# Altium PCB Arduino-Pro-Mini.PcbDoc
Units mil, origin at the board's own origin, x right, y up, seen from the top; angles counter-clockwise.
Board outline 700 x 1300 mil, 2 copper layers (Top, Bottom), stack 61.811 mil thick; 29 components, 33 nets, 108 pads, 29 vias.
Unrouted connection lines stored in the file: 1.
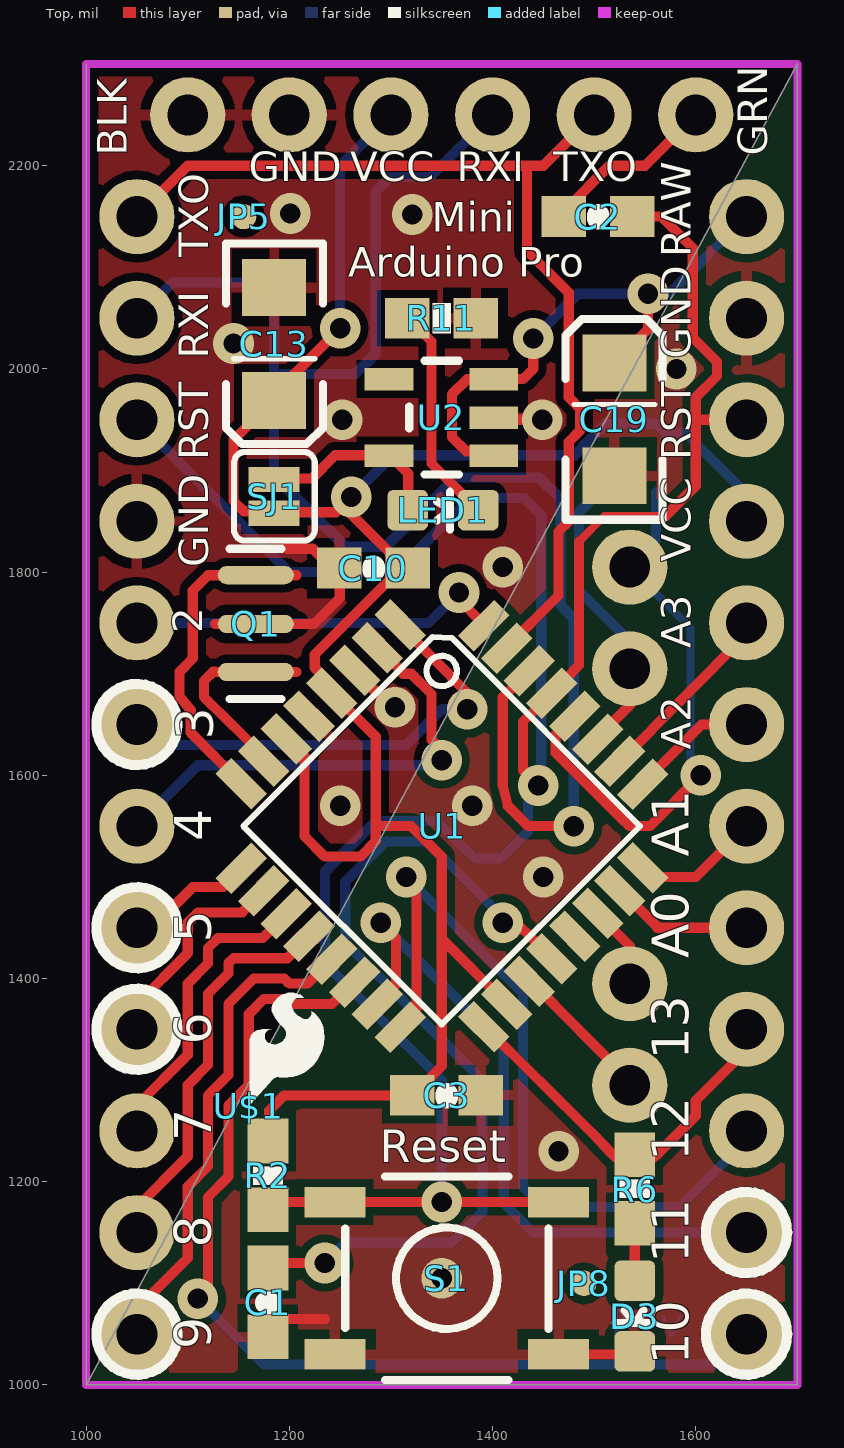
[diagram p0: Top view]
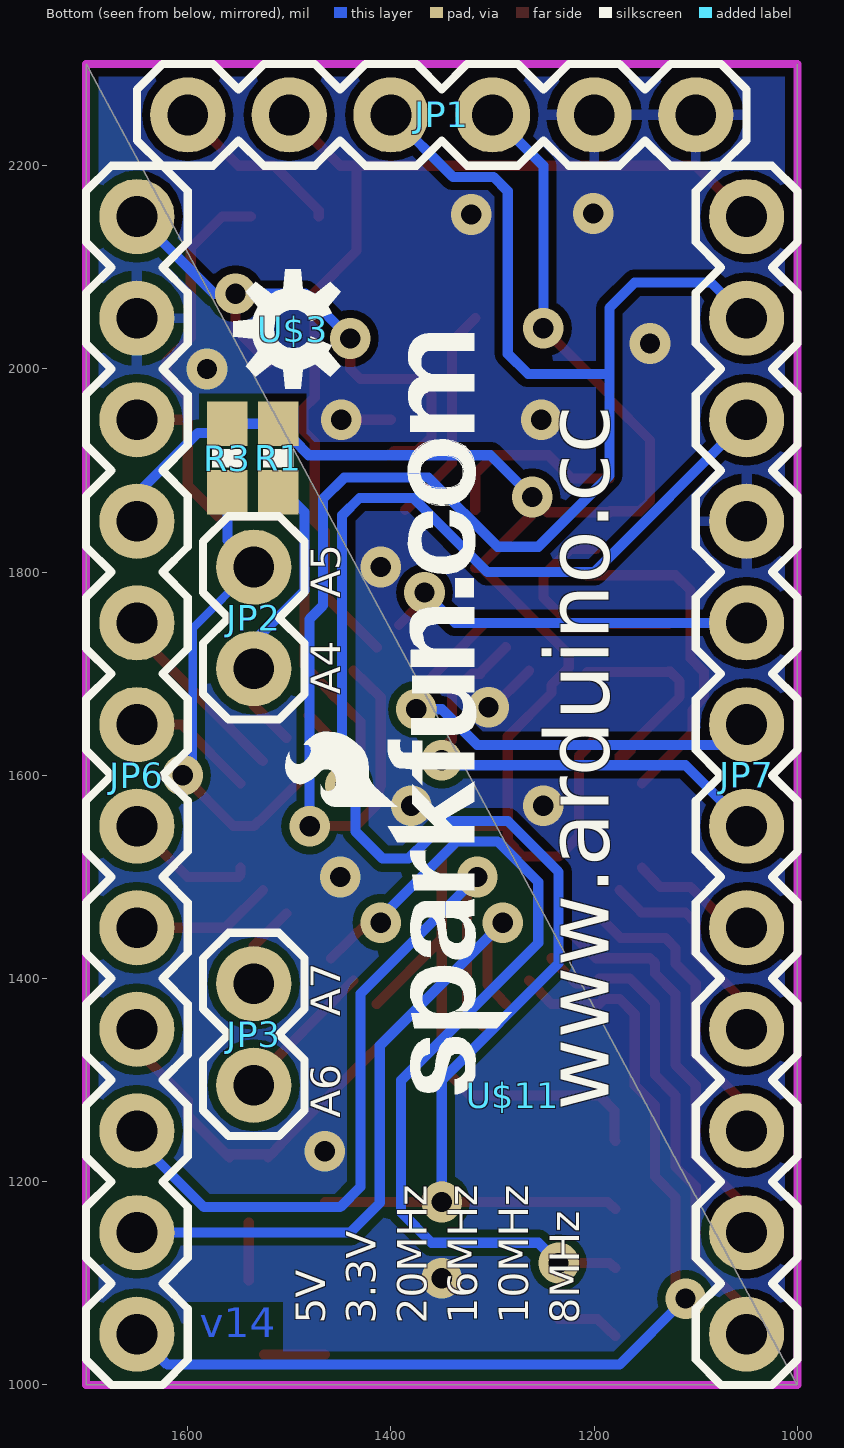
[diagram p1: Bottom view, seen from below]

## Layer stack, top to bottom
Top Solder: solder mask 0.4, Solder Resist, Dk 3.5
Top: signal copper 1.378
Dielectric 1: core 59.0551, FR-4, Dk 4.8
Bottom: signal copper 1.378
Bottom Solder: solder mask 0.4, Solder Resist, Dk 3.5

## Board outline
1000,2300 1000,1000 1700,1000 1700,2300 1000,1000

## Design rules (kind name [scope] priority, off if disabled: settings)
Clearance mdViaVia [IsVia vs IsVia] p1: gap=8
Clearance mdPadVia [IsPad vs IsVia] p2: gap=8
Clearance mdPadPad [IsPad vs IsPad] p3: gap=8
Clearance mdWireVia [(InLayerClass('Signal Layers') AND IsTrack) vs IsVia] p4: gap=8
Clearance mdWirePad [(InLayerClass('Signal Layers') AND IsTrack) vs IsPad] p5: gap=8
Clearance mdWireWire [(InLayerClass('Signal Layers') AND IsTrack) vs (InLayerClass('Signal Layers') AND IsTrack)] p6: gap=8
Clearance [All] p7: gap=8
HoleSize [All] p1: absolutevalues=TRUE maxlimit=100000 minlimit=15 maxpercent=80.000 minpercent=20.000
HoleToHoleClearance [All] p1: gap=8 allowstackedmicrovias=TRUE
PolygonConnect ThermalVias [IsVia] p1: connectstyle=Direct reliefconductorwidth=10 reliefentries=4 polygonreliefangle="90 Angle" airgapwidth=10
PolygonConnect [All] p2: connectstyle=Relief reliefconductorwidth=10 reliefentries=4 polygonreliefangle="90 Angle" airgapwidth=10
RoutingVias [All] p1: holewidth=28 width=50 viastyle="Through Hole" minholewidth=28 minwidth=50 maxholewidth=28 maxwidth=50
SilkToSilkClearance [All] p1 off: silktosilkclearance=10
SilkToSolderMaskClearance [IsPad] p1 off: minsilkscreentomaskgap=10 clearancetoexposedcopper=TRUE
SolderMaskExpansion [All] p1: expansion=4
UnpouredPolygon [All] p1: allowunpoured=FALSE
Width [All] p1: maxlimit=100000 minlimit=7 preferedwidth=10
25 further rules are at their usual default settings.

## Components (designator, comment, footprint, x,y, rotation, side; value= is the part's Value field where it differs from the comment)
C1 "0.1uF" 0603-CAP 1179,1081 r90 top
C2 "0.1uF" 0603-CAP 1504,2150 r180 top
C3 "0.1uF" 0603-CAP 1355,1285 r180 top
C10 "0.1uF" 0603-CAP 1283,1804 r180 top
C13 "10uF" EIA3216 1185,2025 r270 top
C19 "10uF" EIA3216 1520,1950 r90 top
D3 "Green" 0603-LED-ALT1 1540,1068 r180 top
FRAME1 "" CREATIVE_COMMONS 370.78,650 r0 top
JP1 "FTDI Basic" 1X06 1600,2250 r180 bottom
JP2 "" 1X02 1535,1705 r90 bottom
JP3 "" 1X02 1535,1295 r90 bottom
JP5 "" MICRO-FIDUCIAL 1155,2150 r0 top
JP6 "" 1X12 1650,2150 r270 bottom
JP7 "" 1X12 1050,1050 r90 bottom
JP8 "" MICRO-FIDUCIAL 1490,1100 r0 top
LED1 "Red" 0603-LED-ALT1 1351,1861 r270 top
Q1 "8/16/20MHz" RESONATOR-SMD-1:1 1167,1749 r90 top
R1 "" 0603-RES 1511,1912 r90 bottom
R2 "10K" 0603-RES 1179,1206 r90 top
R3 "" 0603-RES 1561,1912 r90 bottom
R6 "330" 0603-RES 1540,1193 r270 top
R11 "10K" 0603-RES 1350,2050 r180 top
S1 "Reset" TACTILE-SWITCH-SMD-ALT01 1355,1105 r180 top
SJ1 "" SJ_2S 1185,1875 r270 top
U1 "ATMEGA328" TQFP32-08 1350,1550 r315 top
U2 "MIC5205" SOT23-5 1350,1952 r90 top
U$1 "" SFE-LOGO-FLAME 1160,1275 r0 top
U$3 "" OSHW-LOGO-S 1496,2039 r90 bottom
U$11 "" SFE-NEW-WEBLOGO 1280,1285 r90 bottom

## Footprints (in the part's own frame and the unit in brackets; to place one, negate y for a bottom-side part, rotate by r counter-clockwise, add the part's x,y. Pads: shape width x height; smd on the part's side, far side on the other; paste and mask are expansions set on the pad)
1X02 [mil] "1X02"
  round 74 hole 40: 1(0,0) 2(100,0)
  silkscreen extent -50,-50 150,50
1X06 [mil] "1X06"
  round 74 hole 40: 1(0,0) 2(100,0) 3(200,0) 4(300,0) 5(400,0) 6(500,0)
  silkscreen extent -50,-50 550,50
1X12 [mil] "1X12"
  round 74 hole 40: 1(0,0) 2(100,0) 3(200,0) 4(300,0) 5(400,0) 6(500,0) 7(600,0) 8(700,0) 9(800,0) 10(900,0) 11(1000,0) 12(1100,0)
  silkscreen extent -50,-50 1150,50
0603-CAP [mil] "0603-CAP"
  rect 44x40 smd: 1(-33.46,0) 2(34,0)
  silkscreen extent 0,-1 0,2
0603-LED-ALT1 [mil] "0603-LED-ALT1"
  rrect30% 40x40 smd: A(0,-34.53) C(0,35)
  silkscreen extent -18,-6 19,7
0603-RES [mil] "0603-RES"
  rect 44x40 smd: 1(-33.46,0) 2(34,0)
  silkscreen extent -9,-15 9,15
CREATIVE_COMMONS [mil] "CREATIVE_COMMONS"
EIA3216 [mil] "EIA3216"
  rect 56x63 smd: A(56,0) C(-55.12,0)
  silkscreen extent -98,-47 99,48
MICRO-FIDUCIAL [mil] "MICRO-FIDUCIAL"
  rrect100% 25x25 smd: 1(0,0)
OSHW-LOGO-S [mil] "OSHW-LOGO-S"
  silkscreen extent -59,-47 59,59
RESONATOR-SMD-1:1 [mil] "RESONATOR-SMD-1:1"
  rrect100% 18x75 smd: 1(-47.24,0) 2(0,0) 3(48,0)
  Top lines w10: -47.24,40 -47.24,0 -47.24,-40 ; 0,40 0,0 0,-40 ; 48,40 48,0 48,-40
  silkscreen extent -74,-25 74,26
SFE-LOGO-FLAME [mil] "SFE-LOGO-FLAME"
  silkscreen extent 1,1 74,111
SFE-NEW-WEBLOGO [mil] "SFE-NEW-WEBLOGO"
  silkscreen extent 1,1 750,224
SJ_2S [mil] "SJ_2S"
  rect 25x50 smd: 1(-16.22,0) 2(17,0)
  silkscreen extent -43,-39 44,40
SOT23-5 [mil] "SOT23-5"
  rect 22x48 smd: 1(-37.4,-51.18) 2(0,-51.18) 3(38,-51.18) 4(38,52) 5(-37.4,52)
  silkscreen extent -56,-17 56,32
TACTILE-SWITCH-SMD-ALT01 [mil] "TACTILE-SWITCH-SMD-ALT01"
  rect 60x30 smd: 1(-110,75) 2(110,75) 3(-110,-75) 4(110,-75)
  silkscreen extent -100,-100 100,100
TQFP32-08 [mil] "TQFP32-08"
  rect 50x22 smd: 1(-169,111) 2(-169,79) 3(-169,48) 4(-169,16) 5(-169,-15.75) 6(-169,-47.24) 7(-169,-78.74) 8(-169,-110.24) 17(169,-110.24) 18(169,-78.74) 19(169,-47.24) 20(169,-15.75) 21(169,16) 22(169,48) 23(169,79) 24(169,111)
  rect 22x50 smd: 9(-110.24,-169) 10(-78.74,-169) 11(-47.24,-169) 12(-15.75,-169) 13(16,-169) 14(48,-169) 15(79,-169) 16(111,-169) 25(111,169) 26(79,169) 27(48,169) 28(16,169) 29(-15.75,169) 30(-47.24,169) 31(-78.74,169) 32(-110.24,169)
  silkscreen extent -138,-138 138,138

## Part data
C1 C2 C3 C10: library part 0603-CAP
C13 C19: library part EIA3216
D3 LED1: library part 0603-LED-ALT1
FRAME1: library part CREATIVE_COMMONS
JP1: library part 1X06
JP2 JP3: library part 1X02
JP5 JP8: library part MICRO-FIDUCIAL
JP6 JP7: library part 1X12
Q1: library part RESONATOR-SMD-1:1
R1 R2 R3 R6 R11: library part 0603-RES
S1: library part TACTILE-SWITCH-SMD-ALT01
SJ1: library part SJ_2S
U1: library part TQFP32-08
U2: library part SOT23-5
U$1: library part SFE-LOGO-FLAME
U$3: library part OSHW-LOGO-S
U$11: library part SFE-NEW-WEBLOGO

## Via types
v1: diameter 40/40 (per signal layer), hole 20, Top to Bottom, 29 vias

## Nets (pads, with @x,y where several pads share a name; then routed paths per layer and width w, separated by ;. In a path a pad name is that pad's centre, name@x,y a point inside that pad or via, vN(x,y) a via of type N, cw(c..) or ccw(c..) an arc to the next point about the centre after c; other vN are vias at no path point)
A0: JP6.8 U1.23 | length 139.9
  Top w10: U1.23@1526,1487 1562,1451 1562,1450 JP6.8
A1: JP6.7 U1.24 | length 130.3
  Top w10: U1.24 1548,1503 1550,1500 1600,1500 JP6.7
A2: JP6.6 U1.25 | length 126
  Top w10: U1.25@1548,1592 1606,1650 JP6.6
A3: JP6.5 U1.26 | length 198.1
  Top w10: U1.26@1526,1614 JP6.5@1650,1739 ; JP6.5@1650,1739 JP6.5 JP6.5@1650,1739
A4: JP2.1 R1.1 U1.27 | length 301.6
  Top w10: U1.27@1503,1637 1535,1669 JP2.1
  Bottom w10: R1.1@1511,1879 R1.1@1511,1885 ; R1.1@1513,1887 R1.1@1511,1885 ; JP2.1 1535,1732 1485,1782 1485,1859 R1.1@1511,1885
A5: JP2.2 R3.1 U1.28 | length 557.2
  Top w10: U1.28@1481,1659 1462,1640 1462,1622 1529,1555 1530,1555 1535,1550 1555,1550 v1(1605,1600)
  Bottom w8: JP2.2 1595,1745 1595,1610 v1(1605,1600)
  Bottom w10: JP2.2 1561,1831 R3.1@1561,1879
A6: JP3.1 U1.19 | length 143.3
  Top w10: U1.19@1437,1398 1535,1299 JP3.1
A7: JP3.2 U1.22 | length 82.3
  Top w10: U1.22@1503,1464 1535,1432 JP3.2
AREF: C1.2 U1.20 | length 898.3
  Top w10: C1.2 1185,1120 v1(1235,1120) ; U1.20@1459,1420 v1@1423,1455 ; v1@1423,1455 v1(1410,1455) v1@1423,1455
  Bottom w10: v1(1235,1120) 1255,1140 1360,1140 1390,1170 1390,1300 1255,1435 1255,1495 1295,1535 1335,1535 1410,1460 v1(1410,1455)
D2: JP7.8 U1.32 | length 371.8
  Top w10: v1(1367,1780) 1367,1773 U1.32@1392,1748
  Bottom w10: JP7.8 1337,1750 v1(1367,1780)
D3: JP7.7 U1.1 | length 473.8
  Top w10: U1.1 v1@1375,1681 ; v1@1375,1681 v1(1375,1665) v1@1375,1681
  Bottom w10: JP7.7 1070,1630 1315,1630 1350,1665 v1(1375,1665)
D4: JP7.6 U1.2 | length 482.8
  Top w10: U1.2@1287,1726 1312,1701 1312,1700 1320,1700 1340,1680 1340,1635 1360,1615 v1(1350,1615)
  Bottom w10: JP7.6 1110,1610 1345,1610 v1(1350,1615)
D5: JP7.5 U1.9 | length 127.7
  Top w10: JP7.5 1065,1450 1105,1490 1135,1490 U1.9@1153,1509
D6: JP7.4 U1.10 | length 226.6
  Top w10: JP7.4@1050,1362 JP7.4 1050,1375 1100,1425 1100,1455 1110,1465 1154,1465 1154,1466 U1.10@1175,1487
D7: JP7.3 U1.11 | length 301.1
  Top w10: JP7.3 1050,1275 1100,1325 1100,1395 1120,1415 1120,1430 1130,1440 1174,1440 U1.11@1198,1464
D8: JP7.2 U1.12 | length 393.5
  Top w10: JP7.2 1050,1175 1100,1225 1100,1295 1120,1315 1120,1385 1140,1405 1140,1415 1145,1420 1198,1420 U1.12@1220,1442
D9: JP7.1 U1.13 | length 487.4
  Top w10: JP7.1 1050,1075 1100,1125 1100,1195 1120,1215 1120,1285 1140,1305 1140,1375 1165,1400 1195,1400 1200,1395 1218,1395 U1.13@1242,1420
D10: JP6.12 U1.14 | length 1002.2
  Top w10: v1(1110,1085) 1120,1095 1120,1185 1140,1205 1140,1275 1160,1295 1160,1365 1175,1380 1190,1380 1195,1375 1242,1375 U1.14@1264,1398
  Bottom w10: v1(1110,1085) 1175,1020 1620,1020 JP6.12
DTR: C2.2 JP1.1 | length 173.9
  Top w10: C2.2@1471,2150 1471,2156 1515,2200 1550,2200 JP1.1
GND: C1.1 C3.1 C10.2 C13.C C19.C D3.C JP1.5 JP1.6 JP6.2 JP7.9 Q1.2 R11.1 S1.1 S1.2 U1.3 U1.5 U1.21 U2.2 | length 367.9
  Top w10: C1.1@1179,1048 1197,1065 1235,1065 ; 1197,1824 1198,1823 1223,1823 1250,1796 1250,1775 1224,1749 1207,1749 ; U1.3@1264,1703 1302,1665 v1@1305,1665 ; U2.2@1400,1950 v1(1449,1950) ; S1.1 D3.C@1525,1030
  other v1: 1350,1105 1465,1230 1450,1500 1250,1570 1380,1570 1304,1667 1410,1805 1252,1950 1581,2000 1145,2025 1321,2152 1201,2153
MISO: JP6.10 U1.16 | length 774.7
  Top w10: U1.16@1309,1353 1325,1370 1325,1490 v1(1315,1500)
  Bottom w10: v1(1315,1500) 1430,1385 1430,1195 1450,1175 1584,1175 1650,1241 JP6.10
MOSI: JP6.11 U1.15 | length 670.5
  Top w10: U1.15@1287,1375 1305,1394 1305,1440 v1(1290,1455)
  Bottom w10: v1(1290,1455) 1411,1334 1411,1179 1440,1150 JP6.11
N$1: Q1.3 U1.8 | length 248.1
  Top w10: 1127,1797 1120,1797 1105,1782 1105,1715 1092,1702 1092,1678 1103,1664 1103,1642 U1.8@1153,1592
N$2: Q1.1 U1.7 | length 134
  Top w10: 1127,1702 1125,1702 1116,1693 1116,1677 1175,1619 1175,1614 U1.7@1164,1625
N$3: LED1.A SJ1.1 U2.5 | length 185
  Top w10: SJ1.1@1185,1892 1222,1892 1245,1915 1299,1915 1317,1897 LED1.A@1317,1861
N$4: LED1.C R11.2 | length 217.6
  Top w10: R11.2@1317,2050 1340,2027 1340,1907 LED1.C
N$7: D3.A R6.2 | length 57
  Top w10: D3.A@1540,1103 R6.2@1540,1160
RAW: C19.A JP6.1 U2.1 U2.3 | length 552.9
  Top w10: U2.1@1402,1915 1397,1919 1374,1919 1360,1933 1360,1975 1375,1990 1402,1990 1430,1990 1440,2000 v1(1440,2030) ; C19.A 1553,2039 v1(1553,2074)
  Bottom w10: v1(1440,2030) 1484,2074 v1(1553,2074) 1574,2074 JP6.1
RESET: C2.1 JP6.3 JP7.10 R2.1 S1.3 S1.4 U1.29 | length 2503.3
  Top w8: 1485,1830 1510,1855 1570,1855
  Top w10: R2.1@1179,1173 1187,1180 S1.4 v1(1350,1180) S1.3 ; v1(1445,1590) 1430,1605 1430,1653 1459,1681 1485,1708 1485,1830 ; C2.1@1538,2150 1566,2150 1597,2119 1597,2031 1621,2007 1621,1993 1600,1972 1600,1950 ; 1570,1855 1600,1885 1600,1950 ; JP6.3 1600,1950
  Bottom w10: JP7.10 1200,1800 1305,1800 1378,1873 1431,1873 1448,1856 1448,1593 v1(1445,1590) 1435,1580 1435,1545 1408,1518 1383,1518 1345,1555 1285,1555 1235,1505 1235,1415 1350,1300 v1(1350,1180)
RXI: JP1.3 JP7.11 U1.30 | length 1632.8
  Top w10: U1.30@1437,1703 1410,1677 1410,1590 1415,1570 1435,1550 v1(1480,1550)
  Bottom w10: JP7.11 1085,2085 1160,2085 1185,2060 1185,1995 ; JP1.3 1339,2189 1299,2189 1285,2175 1285,2015 1265,1995 1185,1995 ; v1(1480,1550) 1480,1754 1467,1767 1467,1872 1446,1893 1363,1893 1295,1825 1255,1825 1185,1895 1185,1995
SCK: JP6.9 R6.1 U1.17 | length 390.1
  Top w10: U1.17@1392,1353 1498,1248 1518,1227 ; R6.1@1521,1224 1518,1227 ; R6.1@1559,1224 1562,1227 ; JP6.9 1650,1330 1600,1280 1600,1265 1562,1227 ; 1518,1227 1540,1227 1562,1227
TXO: JP1.2 JP7.12 U1.31 | length 1016.8
  Top w10: JP7.12 1100,2200 1434,2200 ; U1.31@1414,1726 1465,1777 1465,1840 1475,1850 1475,1928 1486,1939 1486,1961 1475,1972 1475,2075 1434,2116 1434,2200 ; JP1.2 1450,2200 1435,2200 1434,2200
VCC: C3.2 C10.1 C13.A JP1.4 JP6.4 R1.2 R2.2 R3.2 SJ1.2 U1.4 U1.6 U1.18 | length 2263.9
  Top w10: R2.2 1180,1241 1180,1270 1195,1285 1322,1285 1350,1314 1350,1436 ; U1.6@1198,1637 1215,1619 1215,1540 1235,1520 1270,1520 1285,1535 1285,1550 ; U1.4@1242,1682 U1.4@1242,1681 ; v1(1250,2040) 1185,1975 1185,1970 1145,1930 1145,1870 1155,1860 1184,1860 1185,1859 1246,1859 v1(1261,1874) 1261,1857 1314,1804 1317,1804 1310,1804 1225,1719 1225,1706 1242,1689 U1.4@1242,1681 ; U1.18@1414,1375 1350,1439 ; U1.4@1242,1681 1285,1638 1285,1550 ; 1285,1550 1320,1550 1350,1520 1350,1439 ; 1350,1436 1352,1437 1350,1439 ; 1350,1436 1350,1439
  Bottom w10: v1(1250,2040) 1250,2200 JP1.4 ; v1(1261,1874) 1302,1915 1481,1915 R1.2 R3.2 1570,1937 1590,1937 1650,1877 JP6.4
pads on no net: JP5.1 JP8.1 U2.4

## Polygon pours and split planes (outlines as drawn)
GND on Top "Top-GND" (solid, remove dead copper, pour order 2): 995,2305 1705,2305 1705,995 995,995
GND on Bottom "Bottom-GND" (solid, remove dead copper, pour order 4): 995,2305 1705,2305 1705,995 995,995

## Keep-outs
Keep-Out Layer:
  lines w8: 1000,1000 1000,2300 1700,2300 1700,1000 1000,1000

## Other copper
Bottom:
  text "v14" at 1588,1037 h49.6

## Silkscreen, mask and mechanical layers (free items; w line width, h text height)
Top Overlay:
  circle w10: c1050,1350 r40
  circle w10: c1050,1450 r40
  circle w10: c1050,1650 r40
  circle w10: c1050,1050 r40
  circle w10: c1650,1050 r40
  circle w10: c1650,1150 r40
  text "BLK" at 1050,2210 h49.6 r90
  text "GRN" at 1680,2210 h49.6 r90
  text "GND" at 1160,2175 h49.6
  text "VCC" at 1260,2175 h49.6
  text "RXI" at 1365,2175 h49.6
  text "TXO" at 1460,2175 h49.6
  text "Mini" at 1340,2125 h49.6
  text "TXO" at 1130,2110 h49.6 r90
  text "RAW" at 1605,2110 h49.6 r90
  text "Arduino Pro" at 1258,2081 h49.6
  text "RXI" at 1130,2010 h49.6 r90
  text "GND" at 1605,2010 h49.6 r90
  text "RST" at 1130,1910 h49.6 r90
  text "RST" at 1605,1910 h49.6 r90
  text "VCC" at 1605,1810 h49.6 r90
  text "GND" at 1130,1805 h49.6 r90
  text "2" at 1124,1740 h49.6 r90
  text "A3" at 1605,1725 h49.6 r90
  text "3" at 1137,1635 h62 r90
  text "A2" at 1605,1625 h49.6 r90
  text "4" at 1135,1535 h62 r90
  text "A1" at 1605,1520 h62 r90
  text "5" at 1135,1435 h62 r90
  text "A0" at 1605,1420 h62 r90
  text "6" at 1135,1335 h62 r90
  text "13" at 1605,1320 h62 r90
  text "7" at 1135,1240 h62 r90
  text "12" at 1605,1220 h62 r90
  text "Reset" at 1289,1219 h32
  text "8" at 1135,1135 h62 r90
  text "11" at 1605,1120 h62 r90
  text "9" at 1135,1035 h62 r90
  text "10" at 1605,1020 h62 r90
Bottom Overlay:
  text "A5" at 1440,1775 h49.6 r270
  text "A4" at 1440,1680 h49.6 r270
  text "A7" at 1440,1363 h49.6 r270
  text "www.arduino.cc" at 1165,1270 h108.5 r270
  text "A6" at 1440,1263 h49.6 r270
  text "8MHz" at 1205,1060 h49.6 r270
  text "10MHz" at 1255,1060 h49.6 r270
  text "16MHz" at 1305,1060 h49.6 r270
  text "20MHz" at 1355,1060 h49.6 r270
  text "3.3V" at 1405,1060 h49.6 r270
  text "5V" at 1455,1060 h49.6 r270
Dimension:
  lines w8: 1000,1000 1000,2300 1700,2300 1700,1000 1000,1000
tValues:
  text "Valid combinations:" at 1780,2030 h77.5
  text "168V / 3.3V Reg / 8MHz" at 1780,1930 h77.5
  text "168 / 5V Reg / 16MHz" at 1780,1830 h77.5
  text "168 / 5V Reg / 20MHz" at 1780,1730 h77.5
  text "Mark back accordingly" at 1780,1630 h77.5
  text "Arduino Pro Mini" at 720,885 h139.5
tDocu:
  lines w3: 1135,1020 1135,2150 ; 1610,1020 1610,2150
  text "Original Arduino Mini Design by Team Arduino" at 1600,728.98 h59.5
  text "Arduino Pro Mini Design by SparkFun Electronics" at 1600,669.48 h59.5
  text "Revised by Pete Lewis" at 1600,609.98 h59.5

## Text inside footprints (layer, text, board x,y; h text height)
FRAME1: tDocu "Released under the Creative Commons Attribution Share-Alike 3.0 License" at -429.22,850 h108.5; tDocu "http://creativecommons.org/licenses/by-sa/3.0" at 370.78,750 h108.5; tDocu "Designed by:" at 820.78,650 h108.5